# Altium PCB Joystick Board.PcbDoc
Units mil, origin at the board's own origin, x right, y up, seen from the top; angles counter-clockwise.
Board outline 2730 x 2065 mil, 2 copper layers (Top Layer, Bottom Layer); 7 components, 39 nets, 34 pads, 0 vias.
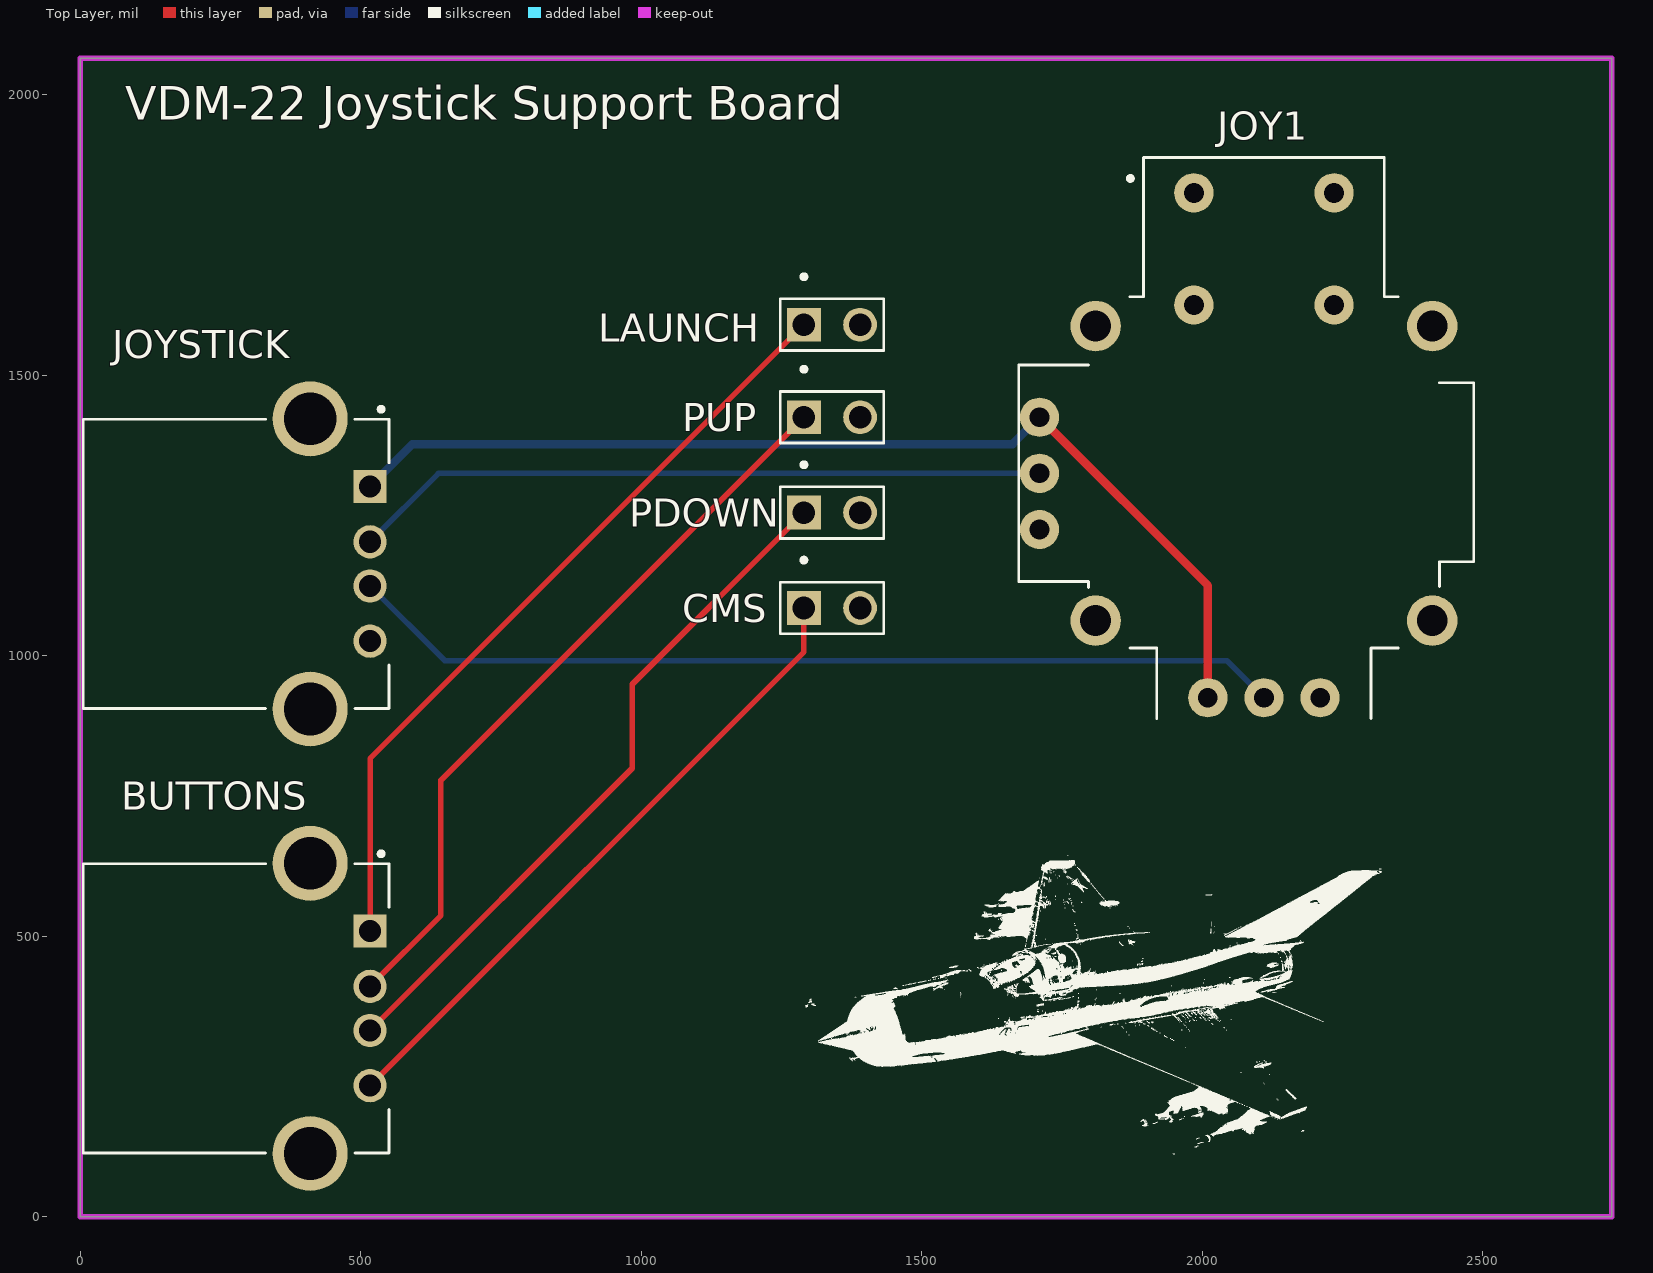
[diagram p0: Top Layer view]
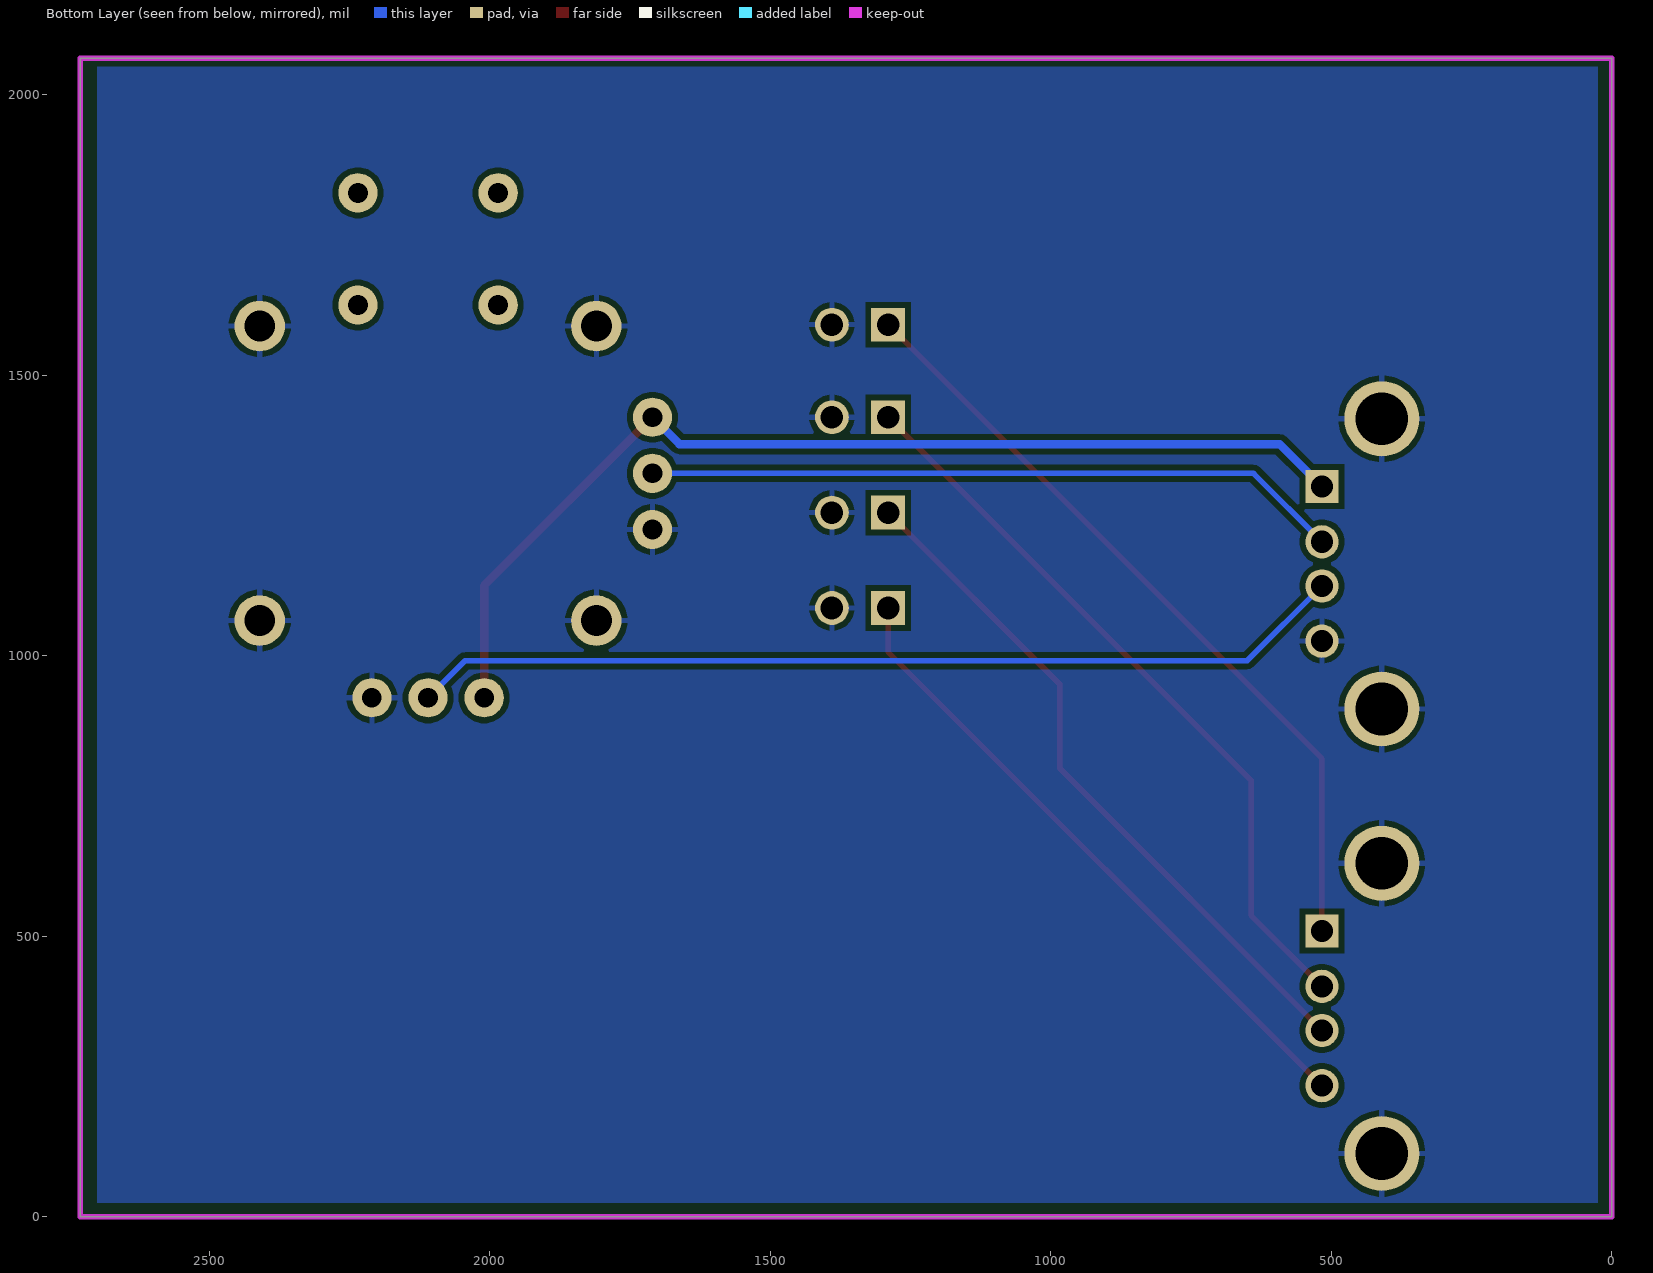
[diagram p1: Bottom Layer view, seen from below]

## Layer stack, top to bottom
Top Solder: solder mask 0.4, Solder Resist, Dk 3.5
Top Layer: signal copper 1.4
Dielectric 1: dielectric 12.6, FR-4, Dk 4.8
Bottom Layer: signal copper 1.4
Bottom Solder: solder mask 0.4, Solder Resist, Dk 3.5

## Board outline
0,0 2730,0 2730,2065 0,2065

## Design rules (kind name [scope] priority, off if disabled: settings)
Clearance [All] p1: gap=10 ignorepadtopadclearanceinfootprint=FALSE except(0: Arc-Hole Track-Hole SMDPad-Hole THPad-Hole Via-Hole Fill-Hole Poly-Hole Region-Hole Text-Hole)
PolygonConnect [All] p1: connectstyle=Relief reliefconductorwidth=10 reliefentries=4 polygonreliefangle="90 Angle" airgapwidth=10
RoomDefinition "Joystick Board" [InComponentClass('Joystick Board')] p1: confinementstyle=ConfineIn formatcopy=TRUE lockcomponents=TRUE outline -30,-20 2755,-20 2755,2090 -30,2090
RoutingVias [All] p1: holewidth=28 width=50 viastyle="Through Hole" minholewidth=28 minwidth=50 maxholewidth=28 maxwidth=50
SolderMaskExpansion [All] p1: expansion=4 istentingtop=FALSE
Width "Schematic Width Constraint_5" [InNet('OUTB')] p1: maxlimit=20 minlimit=10 preferedwidth=20 minimp=50.000000 maximp=50.000000 favimp=50.000000
Width "Schematic Width Constraint_4" [InNet('OUTA')] p2: maxlimit=20 minlimit=10 preferedwidth=20 minimp=50.000000 maximp=50.000000 favimp=50.000000
Width "Schematic Width Constraint_3" [InNet('+12')] p3: maxlimit=15 minlimit=15 preferedwidth=15 minimp=50.000000 maximp=50.000000 favimp=50.000000
Width "Schematic Width Constraint_2" [InNet('+5')] p4: maxlimit=15 minlimit=15 preferedwidth=15 minimp=50.000000 maximp=50.000000 favimp=50.000000
Width "Schematic Width Constraint_1" [InNet('NetR1_1')] p5: maxlimit=20 minlimit=10 preferedwidth=10 minimp=50.000000 maximp=50.000000 favimp=50.000000
Width "Schematic Width Constraint" [InNet('NetR2_1')] p6: maxlimit=20 minlimit=10 preferedwidth=10 minimp=50.000000 maximp=50.000000 favimp=50.000000
Width [All] p7: maxlimit=10 minlimit=10 preferedwidth=10
30 further rules are at their usual default settings.

## Components (designator, comment, footprint, x,y, rotation, side; value= is the part's Value field where it differs from the comment)
BUTTONS "UE27AC54100" AMPHENOL_UE27AC54100 516.69,371.34 r270 top
CMS "5-146281-2" TE_5-146281-2 1340,1085 r0 top
JOY1 "COM-09032" XDCR_COM-09032 2110,1325 r0 top
JOYSTICK "UE27AC54100" AMPHENOL_UE27AC54100 516.69,1163.66 r270 top
LAUNCH "5-146281-2" TE_5-146281-2 1340,1590 r0 top
PDOWN "5-146281-2" TE_5-146281-2 1340,1255 r0 top
PUP "5-146281-2" TE_5-146281-2 1340,1425 r0 top

## Footprints (in the part's own frame and the unit in brackets; to place one, negate y for a bottom-side part, rotate by r counter-clockwise, add the part's x,y. Pads: shape width x height; smd on the part's side, far side on the other; paste and mask are expansions set on the pad)
AMPHENOL_UE27AC54100 [mm]
  rect 1.508x1.508 hole 1: 1(-3.5,0)
  round 1.508 hole 1: 2(-1,0) 3(1,0) 4(3.5,0)
  round 3.396 hole 2.38: S1(-6.57,-2.71) S2(6.57,-2.71)
  silkscreen extent -7.1,-12.99 6.55,0.86
TE_5-146281-2 [mm]
  rect 1.53x1.53 hole 1.02: 1(-1.27,0)
  round 1.53 hole 1.02: 2(1.27,0)
  silkscreen extent -2.34,-1.17 2.34,2.27
XDCR_COM-09032 [mil]
  round 70 hole 35.43: B1A(-125,500) B1B(125,500) B2A(-125,300) B2B(125,300)
  round 70 hole 35: H1(-100,-400) H2(0,-400) H3(100,-400) V1(-400,100) V2(-400,0) V3(-400,-100)
  round 90 hole 55: S1(-300,262.5) S2(-300,-262.5) S3(300,-262.5) S4(300,262.5)
  silkscreen extent -437,-437 374,563

## Part data
BUTTONS JOYSTICK: "USB-A _USB TYPE-A_ USB 2.0 Receptacle Connector 4 Position Through Hole, Right Angle", Package=None, Digi-Key_Part_Number=UE27AC54100-ND, Digi-Key_Purchase_URL=https://www.digikey.com/product-detail/en/amphenol-icc-commercial-products/UE27AC54100/UE27AC54100-ND/1972253?utm_source=snapeda&utm_medium=aggregator&utm_campaign=symbol, MF="Amphenol ICC _Commercial Products_", MP=UE27AC54100, SnapEDA_Link=https://www.snapeda.com/parts/UE27AC54100/Amphenol%20Commercial%20Products/view-part/4701388/?ref=snap
CMS LAUNCH PDOWN PUP: "Header; Breakaway; 0.100 in.; PC Board; Single; 2; 0.025 in.; 0.12 in.; 3 A", Package=None, Availability=Unavailable, Centerline_Pitch="2.54 mm[.1 in]", EU_RoHS_Compliance=Compliant, MF="TE Connectivity", MP=5-146281-2, Number_of_Positions=2, Price=None, Product_Type=Connector, SnapEDA_Link=https://www.snapeda.com/parts/5-146281-2/TE%20Connectivity%20AMP%20Connectors/view-part/457165/?ref=snap
JOY1: "Thumb Joystick", Package=None, Availability=Unavailable, MP=COM-09032, Price=None

## Nets (pads, with @x,y where several pads share a name; then routed paths per layer and width w, separated by ;. In a path a pad name is that pad's centre, name@x,y a point inside that pad or via, vN(x,y) a via of type N, cw(c..) or ccw(c..) an arc to the next point about the centre after c; other vN are vias at no path point)
+5: JOY1.H1 JOY1.V1 JOYSTICK.1 | length 1868.7
  Top Layer w15: JOY1.V1 2010,1125 JOY1.H1
  Bottom Layer w15: JOYSTICK.1 592.24,1377 1662,1377 JOY1.V1
+12: 
AGND: 
BEEPER: 
CMS: BUTTONS.4 CMS.1 | length 1171.8
  Top Layer w10: BUTTONS.4 1290,1006.85 CMS.1
DB0: 
DB1: 
DB2: 
DB3: 
DB4: 
DB5: 
DB6: 
DB7: 
GND: BUTTONS.S1 BUTTONS.S2 CMS.2 JOY1.H3 JOY1.S1 JOY1.S2 JOY1.S3 JOY1.S4 JOY1.V3 JOYSTICK.4 JOYSTICK.S1 JOYSTICK.S2 LAUNCH.2 PDOWN.2 PUP.2
Launch: BUTTONS.1 LAUNCH.1 | length 1401.2
  Top Layer w10: BUTTONS.1 516.69,816.69 LAUNCH.1
nAB: 
NetC8_1: 
NetC9_1: 
NetJ5_1: 
NetJ5_2: 
NetJ5_3: 
NetJ5_4: 
NetJ6_1: 
NetJ6_2: 
NetLS_P: 
NetR1_1: 
NetR2_1: 
nLDAC: 
nRST: 
nWR: 
OUTA: 
OUTB: 
PDOWN: BUTTONS.3 PDOWN.1 | length 1243.3
  Top Layer w10: BUTTONS.3 984,799.28 984,949 PDOWN.1
pLAUNCH: 
PUP: BUTTONS.2 PUP.1 | length 1334.6
  Top Layer w10: BUTTONS.2 643,537.02 643,778 PUP.1
RXRWRF: 
STICKX: JOY1.H2 JOYSTICK.3 | length 1675.9
  Bottom Layer w10: JOYSTICK.3 649.98,991 2044,991 JOY1.H2
STICKY: JOY1.V2 JOYSTICK.2 | length 1243.8
  Bottom Layer w10: JOYSTICK.2 638.66,1325 JOY1.V2
TXRWRR: 
pads on no net: JOY1.B1A JOY1.B1B JOY1.B2A JOY1.B2B

## Polygon pours and split planes (outlines as drawn)
GND on Bottom Layer "GND_L02_P000" (solid, pour order 0): 25,2050 25,25 2700,25 2700,2050

## Keep-outs
Keep-Out Layer:
  the board outline again, w10

## Silkscreen, mask and mechanical layers (free items; w line width, h text height)
Top Overlay:
  drawing of 647 lines, arcs and shapes, not listed
  text "VDM-22 Joystick Support Board" at 80,1954.99 h60